# Altium PCB ui_layout-v1.1.PcbDoc
Units mil, origin at the board's own origin, x right, y up, seen from the top; angles counter-clockwise.
Board outline 3110 x 2130 mil, 4 copper layers (Signal Layer 1, Power Plane, GND Plane, Signal Layer 2), stack 63.189 mil thick; 80 components, 72 nets, 283 pads, 452 vias.
Unrouted connection lines stored in the file: 97.
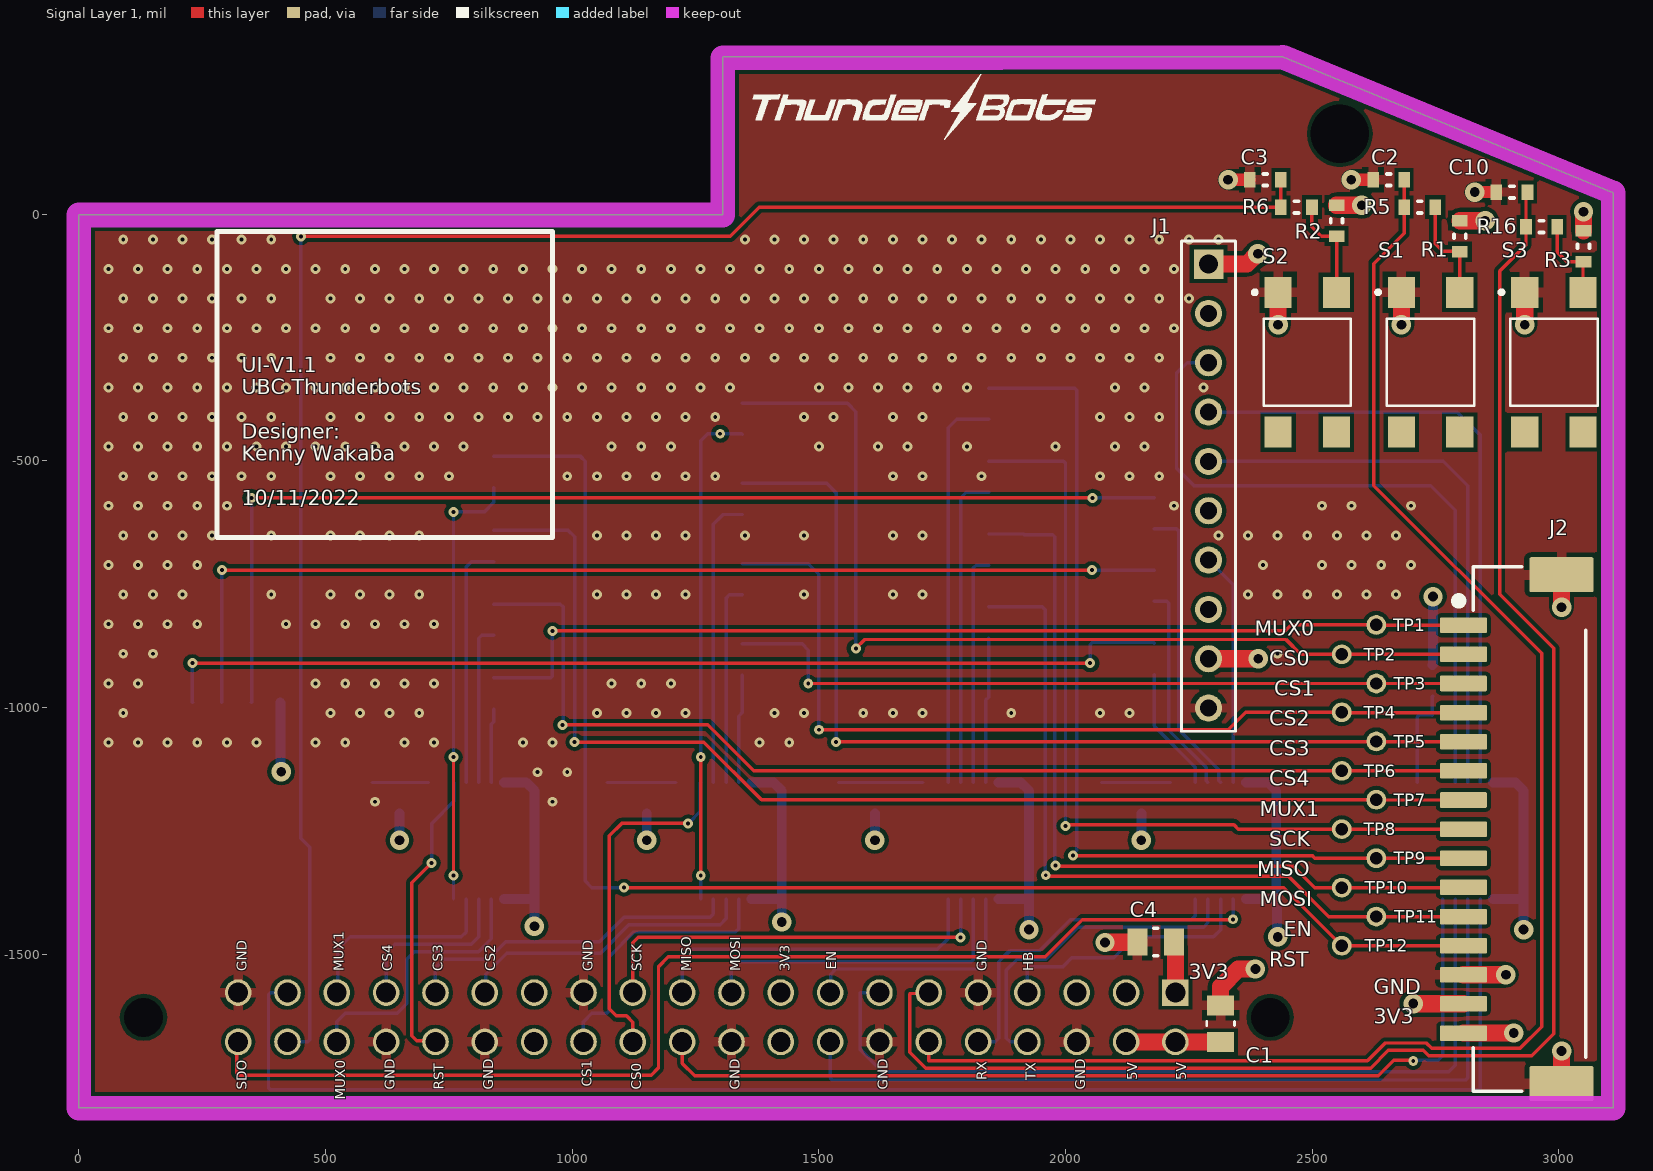
[diagram p0: Signal Layer 1 view]
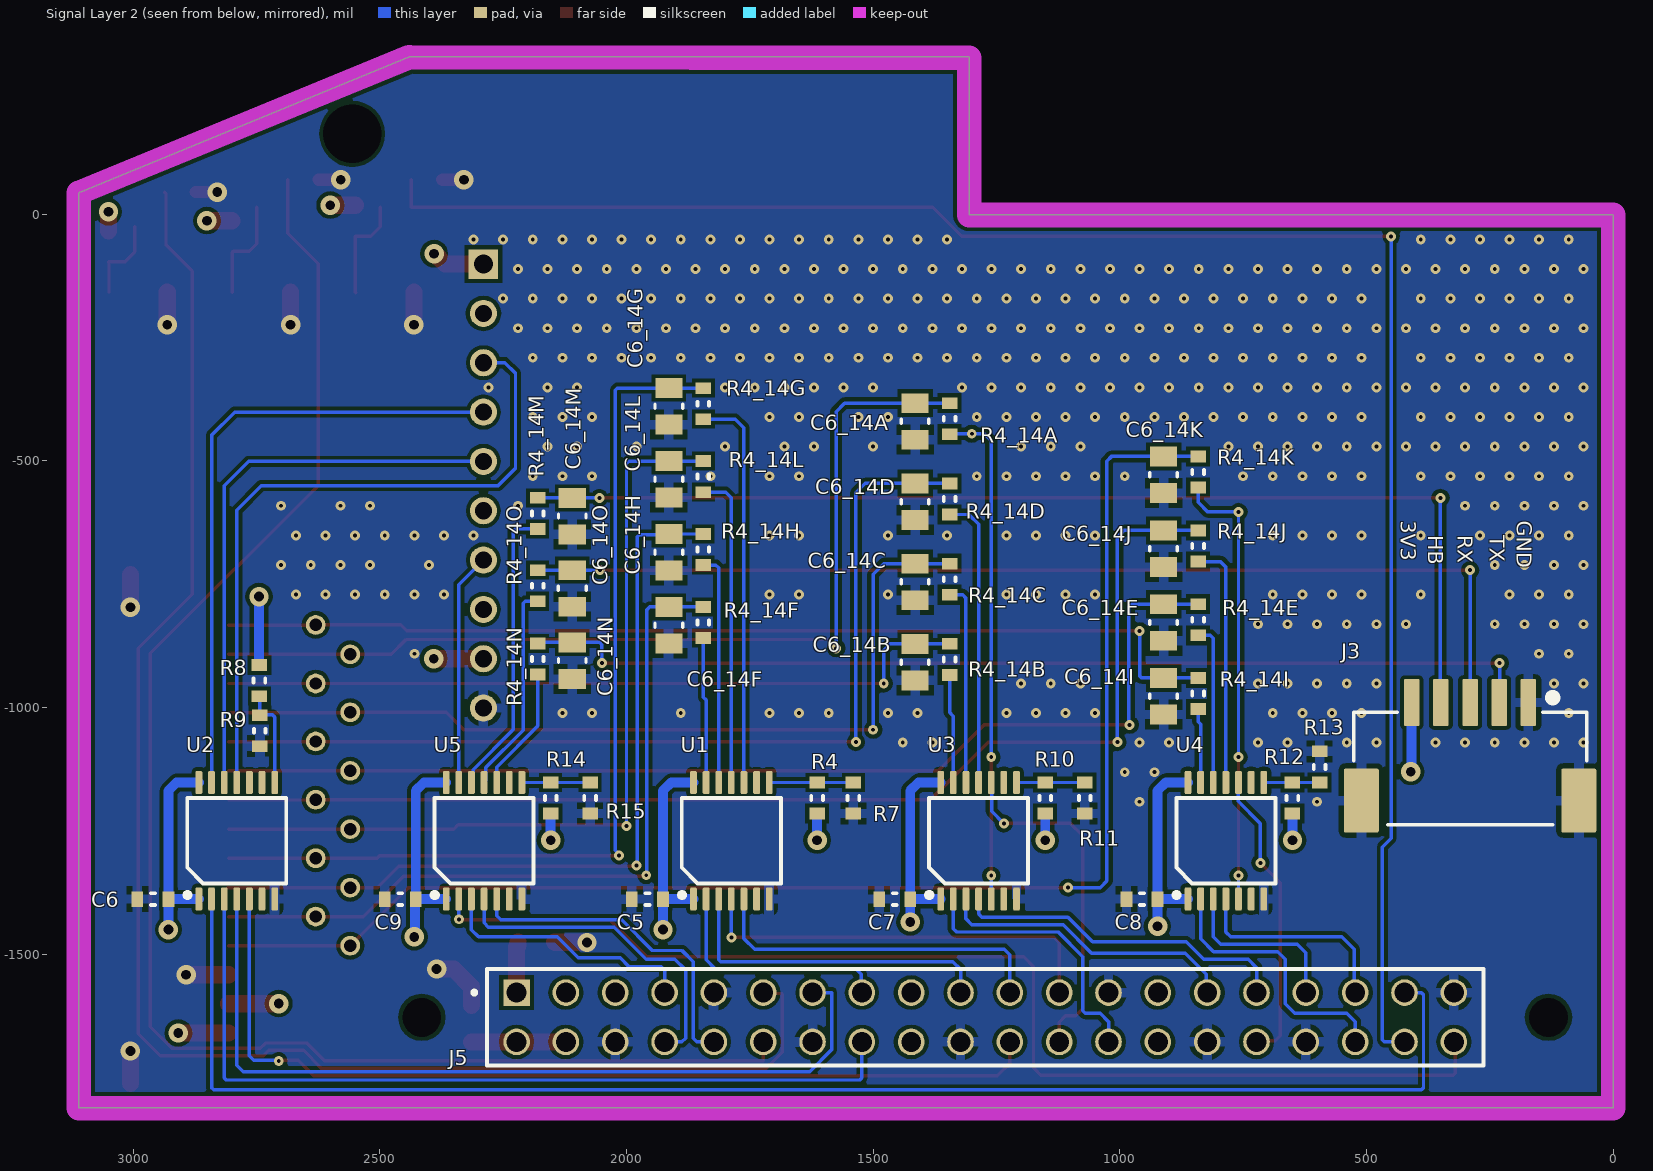
[diagram p1: Signal Layer 2 view, seen from below]
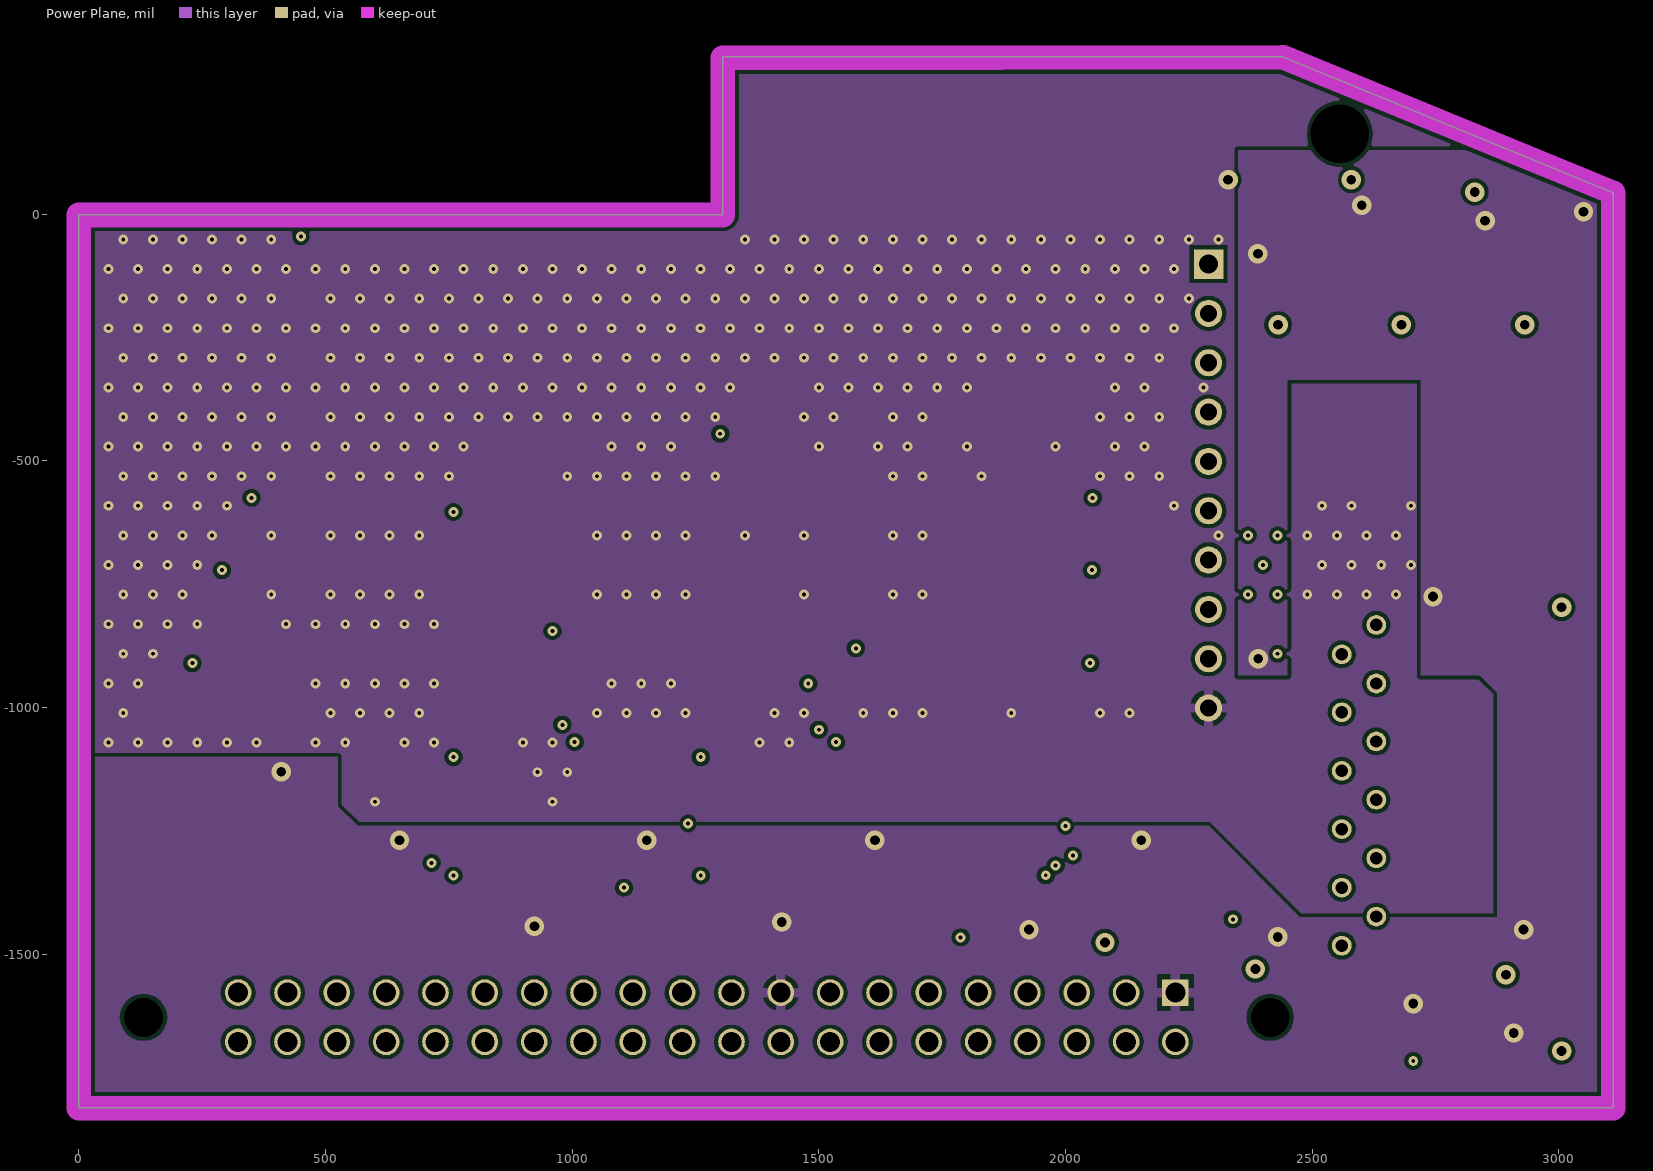
[diagram p2: Power Plane]
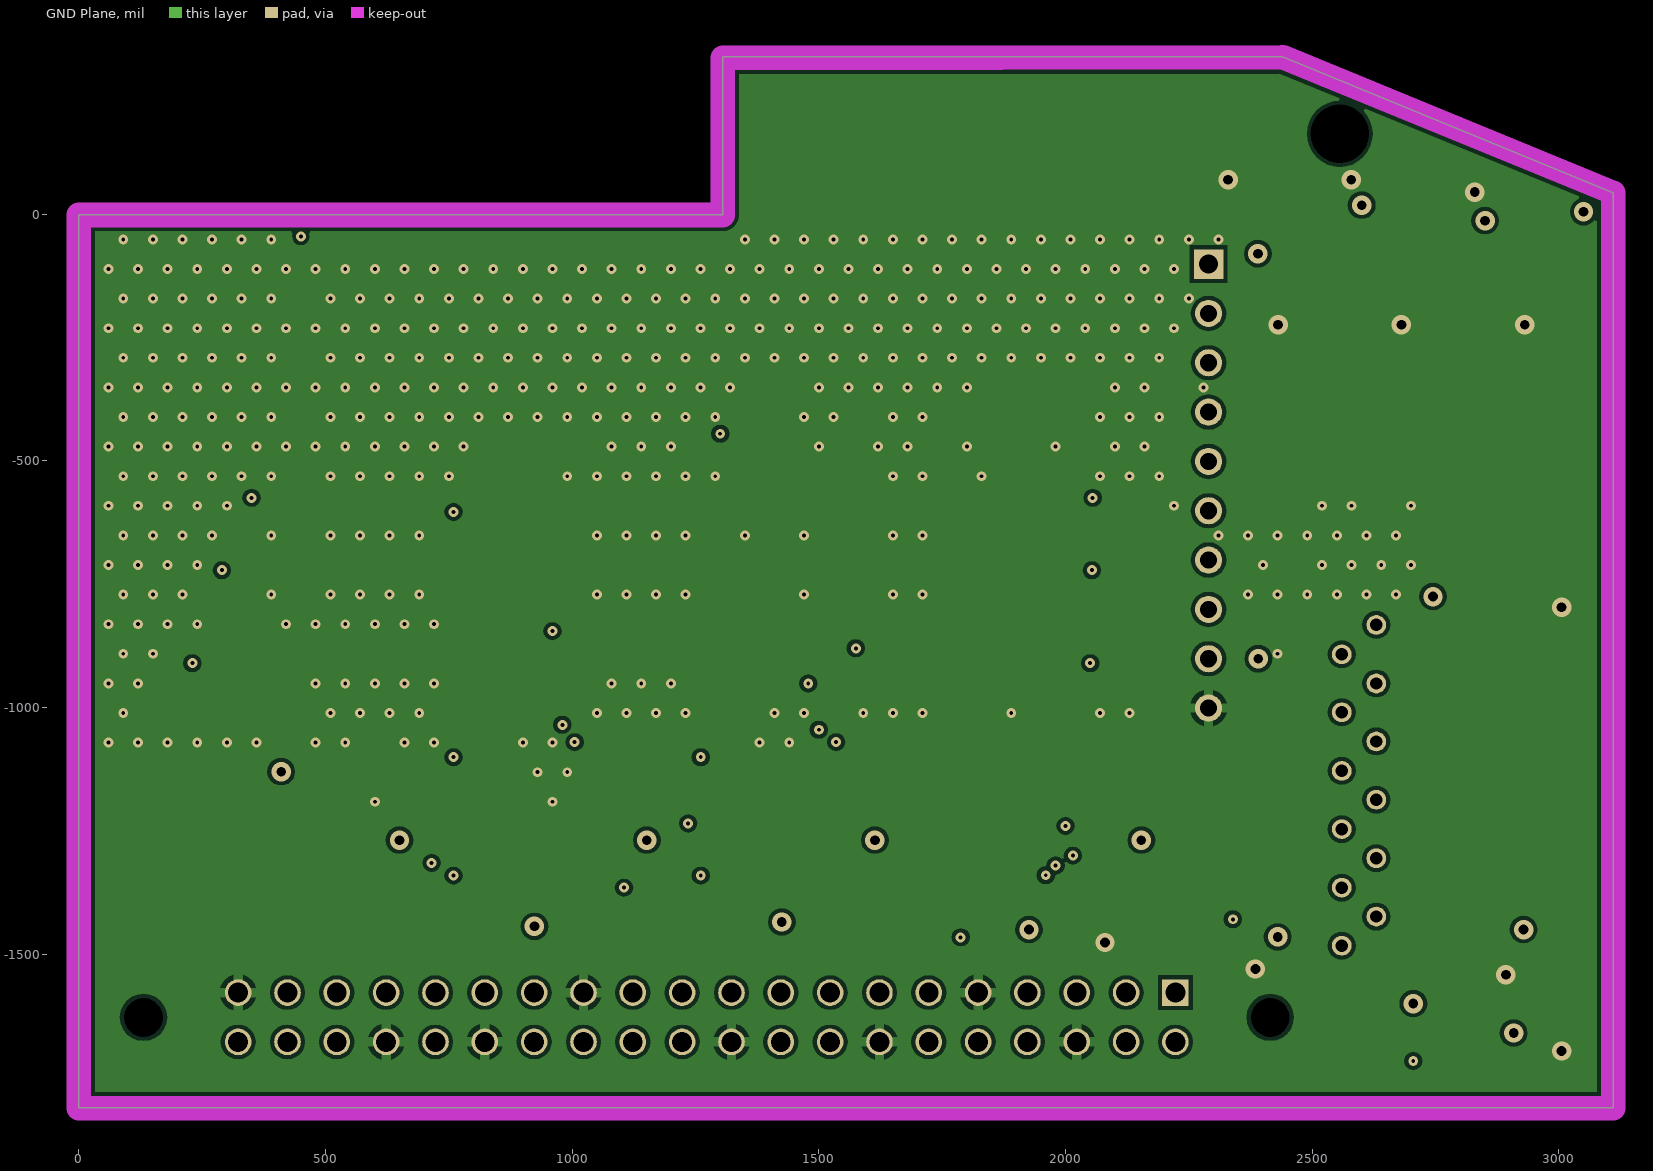
[diagram p3: GND Plane]

## Layer stack, top to bottom
Top Mask: solder mask 0.591, Solder Resist, Dk 3.8
Signal Layer 1: signal copper 1.378
Dielectric 1: prepreg 3.937, 2313, Dk 4.05
Power Plane: signal copper 1.378
Core: core 49.803, FR-4, Dk 4.5
GND Plane: signal copper 1.378
Dielectric 2: prepreg 3.937, 2313, Dk 4.05
Signal Layer 2: signal copper 1.378
Bottom Mask: solder mask 0.591, Solder Resist, Dk 3.8

## Board outline
1305,319 1305,-1 0,-1 0,-1811 3110,-1811 3110,44 2440,319

## Design rules (kind name [scope] priority, off if disabled: settings)
BoardOutlineClearance [All] p1: gap=7.87 ignorepadtopadclearanceinfootprint=FALSE except(15.75: Arc-SplitBarrior Arc-SplitContinuation Track-SplitBarrior Track-SplitContinuation SMDPad-SplitBarrior SMDPad-SplitContinuation THPad-SplitBarrior THPad-SplitContinuation Via-SplitBarrior Via-SplitContinuation Fill-SplitBarrior Fill-SplitContinuation Poly-SplitBarrior Poly-SplitContinuation Region-SplitBarrior Region-SplitContinuation Text-SplitBarrior Text-SplitContinuation)
Clearance "JETSON_5V Polygon Clearance" [(InNet('JETSON_5V')) AND InPolygon] p1: gap=15 ignorepadtopadclearanceinfootprint=FALSE
Clearance "POWER_5V Polygon Clearance" [(InNet('POWER_5V')) AND InPolygon] p2: gap=20 ignorepadtopadclearanceinfootprint=TRUE
Clearance [All] p3: gap=8 ignorepadtopadclearanceinfootprint=FALSE
HoleSize [All] p1: absolutevalues=TRUE maxlimit=248.03 minlimit=7.87 maxpercent=80.000 minpercent=20.000
MinimumAnnularRing [All] p1: minimumring=3
MinimumSolderMaskSliver [All] p1: minsoldermaskwidth=3.94
PolygonConnect PolygonConnect_1 [All] p1: thpad.connectstyle=Relief thpad.reliefconductorwidth=20 thpad.reliefentries=4 thpad.polygonreliefangle="90 Angle" thpad.airgapwidth=10 smdpad.connectstyle=Relief smdpad.reliefconductorwidth=20 smdpad.reliefentries=4 smdpad.polygonreliefangle="90 Angle" smdpad.airgapwidth=10 via.connectstyle=Direct via.reliefconductorwidth=20 via.reliefentries=4 via.polygonreliefangle="90 Angle" via.airgapwidth=10
RoutingCorners [All] p1: cornerstyle=Round minsetback=100 maxsetback=100
RoutingVias [All] p1: holewidth=19.68 width=39.37 viastyle="Through Hole" minholewidth=7.87 minwidth=17.72 maxholewidth=39.37 maxwidth=78.74
SilkToSilkClearance [All] p1: silktosilkclearance=3.94
SilkToSolderMaskClearance [IsPad] p1: minsilkscreentomaskgap=3.94 clearancetoexposedcopper=TRUE
SolderMaskExpansion SolderMaskExpansion_Via [IsVia] p1: expansion=4 istentingtop=TRUE
SolderMaskExpansion [All] p2: expansion=4 istentingtop=FALSE
Width [All] p1: maxlimit=100 minlimit=4 preferedwidth=7
25 further rules are at their usual default settings.

## Classes and differential pairs
component class U_buffers: C5 C6 C7 C8 C9 R4 R7 R8 R9 R10 R11 R12 R13 R14 R15 U1 U2 U3 U4 U5
component class LF_PWR_HRBT: C6_14M R4_14M
component class LF_MD_MUX_0: C6_14I R4_14I
component class LF_MD_RESET: C6_14K R4_14K
component class LF_MD_CS0: C6_14A R4_14A
component class LF_PWR_RX: C6_14N R4_14N
component class LF_MD_MUX_1: C6_14J R4_14J
component class LF_MD_CS1: C6_14B R4_14B
component class LF_MD_CS2: C6_14C R4_14C
component class U_jetson-nano: C1 C4 J4 J5
component class U_power: J3
component class U_motor-driver: J2 TP1 TP2 TP3 TP4 TP5 TP6 TP7 TP8 TP9 TP10 TP11 TP12
component class U_interface-switches: C2 C3 C10 R1 R2 R3 R5 R6 R16 S1 S2 S3
component class U_display: J1
component class LF_MD_SCK: C6_14L R4_14L
component class LF_PWR_TX: C6_14O R4_14O
component class LF_MD_MOSI: C6_14H R4_14H
component class LF_MD_MISO: C6_14G R4_14G
component class LF_MD_EN: C6_14F R4_14F
component class LF_MD_CS4: C6_14E R4_14E
component class LF_MD_CS3: C6_14D R4_14D
channel class low-pass-filter: CTRL_EN_FILTER HEARTBEAT_FILTER LF_MD_CS0 LF_MD_CS1 LF_MD_CS2 LF_MD_CS3 LF_MD_CS4 LF_MD_EN LF_MD_MISO LF_MD_MOSI LF_MD_MUX_0 LF_MD_MUX_1 LF_MD_RESET LF_MD_SCK LF_PWR_HRBT LF_PWR_RX LF_PWR_TX RESET_FILTER SPI1_CS0_FILTER SPI1_CS1_FILTER SPI1_CS2_FILTER SPI1_CS3_FILTER SPI1_CS4_FILTER SPI1_CS5_FILTER SPI1_MISO_FILTER SPI1_MOSI_FILTER SPI1_SCK_FILTER UART2_RX_FILTER UART2_TX_FILTER

## Components (designator, comment, footprint, x,y, rotation, side; value= is the part's Value field where it differs from the comment)
C1 "0.10uF 25V" 0805 2314.34,-1640.76 r270 top value=0.1uF
C2 "0.10uF" 0603 2655.04,70 r0 top
C3 "0.10uF" 0603 2405.04,70 r0 top
C4 "0.10uF 25V" 0805 2183,-1475 r0 top value=0.1uF
C5 "0.10uF" 0603 1957.5,-1388.11 r0 bottom
C6 "0.10uF" 0603 2960,-1388.11 r0 bottom
C6_14A "330pF" 0805 1415,-420 r90 bottom (schematic designator C6_14)
C6_14B "330pF" 0805 1415,-908 r90 bottom (schematic designator C6_14)
C6_14C "330pF" 0805 1415,-745.33 r90 bottom (schematic designator C6_14)
C6_14D "330pF" 0805 1415,-582.67 r90 bottom (schematic designator C6_14)
C6_14E "330pF" 0805 911.28,-827.5 r90 bottom (schematic designator C6_14)
C6_14F "330pF" 0805 1914.18,-833 r90 bottom (schematic designator C6_14)
C6_14G "330pF" 0805 1914.18,-389.44 r90 bottom (schematic designator C6_14)
C6_14H "330pF" 0805 1914.18,-685.15 r90 bottom (schematic designator C6_14)
C6_14I "330pF" 0805 911.28,-977 r90 bottom (schematic designator C6_14)
C6_14J "330pF" 0805 911.28,-678 r90 bottom (schematic designator C6_14)
C6_14K "330pF" 0805 911.28,-528 r90 bottom (schematic designator C6_14)
C6_14L "330pF" 0805 1914.18,-537.29 r90 bottom (schematic designator C6_14)
C6_14M "330pF" 0805 2110,-612 r90 bottom (schematic designator C6_14)
C6_14N "330pF" 0805 2110,-905 r90 bottom (schematic designator C6_14)
C6_14O "330pF" 0805 2110,-758.5 r90 bottom (schematic designator C6_14)
C7 "0.10uF" 0603 1456.25,-1388.11 r0 bottom
C8 "0.10uF" 0603 955,-1388.11 r0 bottom
C9 "0.10uF" 0603 2458.75,-1388.11 r0 bottom
C10 "0.10uF" 0603 2905,45 r0 top
J1 "CN LCD TFT 128X160 1.8in" "CN LCD TFT 128X160 1.8in" 2290,-101 r0 top locked
J2 "BM15B-ZESS-TBT(LF)(SN)" "JST ZE SMT 15POS" 2915,-1276 r90 top locked
J3 "BM05B-ZESS-TBT(LF)(SN)" "JST ZE SMT 5POS" 290,-1098 r180 bottom locked
J5 "CN HDR 40POS" "CN HDR 40POS 0.1 TH" 1272.83,-1627.77 r0 bottom locked
R1 "10k" 0603 2799.53,-44.53 r270 top
R2 "10k" 0603 2549.53,-13.03 r270 top
R3 "10k" 0603 3050,-65 r270 top
R4 "JUMPER" 0603 1613.66,-1183.39 r90 bottom value=0
R4_14A "JUMPER" 0603 1345,-414.5 r270 bottom (schematic designator R4_14)
R4_14B "JUMPER" 0603 1345,-902.5 r270 bottom (schematic designator R4_14)
R4_14C "JUMPER" 0603 1345,-739.83 r270 bottom (schematic designator R4_14)
R4_14D "JUMPER" 0603 1345,-577.16 r270 bottom (schematic designator R4_14)
R4_14E "JUMPER" 0603 841.28,-822 r270 bottom (schematic designator R4_14)
R4_14F "JUMPER" 0603 1844.18,-827.5 r270 bottom (schematic designator R4_14)
R4_14G "JUMPER" 0603 1844.18,-383.93 r270 bottom (schematic designator R4_14)
R4_14H "JUMPER" 0603 1844.44,-679.64 r270 bottom (schematic designator R4_14)
R4_14I "JUMPER" 0603 841.28,-971.5 r270 bottom (schematic designator R4_14)
R4_14J "JUMPER" 0603 841.28,-672.5 r270 bottom (schematic designator R4_14)
R4_14K "JUMPER" 0603 841.28,-522.5 r270 bottom (schematic designator R4_14)
R4_14L "JUMPER" 0603 1844.18,-531.79 r270 bottom (schematic designator R4_14)
R4_14M "JUMPER" 0603 2180,-606.5 r270 bottom (schematic designator R4_14)
R4_14N "JUMPER" 0603 2180,-901.5 r270 bottom (schematic designator R4_14)
R4_14O "JUMPER" 0603 2180,-753 r270 bottom (schematic designator R4_14)
R5 "10k" 0603 2718.03,14.53 r0 top
R6 "10k" 0603 2468.03,14.53 r0 top
R7 "JUMPER" 0603 1540,-1183.39 r270 bottom value=0
R8 "JUMPER" 0603 2744.03,-945.32 r270 bottom value=0
R9 "JUMPER" 0603 2743.29,-1046.81 r270 bottom value=0
R10 "JUMPER" 0603 1151.25,-1183.39 r90 bottom value=0
R11 "JUMPER" 0603 1071.25,-1183.39 r270 bottom value=0
R12 "JUMPER" 0603 650,-1183.39 r90 bottom value=0
R13 "JUMPER" 0603 595,-1120.39 r90 bottom value=0
R14 "JUMPER" 0603 2153.75,-1183.39 r90 bottom value=0
R15 "JUMPER" 0603 2073.75,-1183.39 r270 bottom value=0
R16 "10k" 0603 2965,-25 r0 top
S1 "SW PUSH NO SMD" TL3305 2740,-300 r0 top
S2 "SW PUSH NO SMD" TL3305 2490,-300 r0 top
S3 "SW PUSH NO SMD" TL3305 2990,-300 r0 top
TP1 "Test Point (Via)" TP 2630,-832.45 r0 top
TP2 "Test Point (Via)" TP 2560,-892.14 r90 top
TP3 "Test Point (Via)" TP 2630,-951.2 r90 top
TP4 "Test Point (Via)" TP 2560,-1009.61 r90 top
TP5 "Test Point (Via)" TP 2630,-1068.67 r90 top
TP6 "Test Point (Via)" TP 2560,-1128.36 r90 top
TP7 "Test Point (Via)" TP 2630,-1186.78 r90 top
TP8 "Test Point (Via)" TP 2560,-1246.47 r90 top
TP9 "Test Point (Via)" TP 2630,-1305.53 r90 top
TP10 "Test Point (Via)" TP 2560,-1365 r90 top
TP11 "Test Point (Via)" TP 2630,-1423.64 r90 top
TP12 "Test Point (Via)" TP 2560,-1482.69 r90 top
U1 "TXU0304PWR" 14-TSSOP 1787.5,-1270 r90 bottom
U2 "TXU0304PWR" 14-TSSOP 2790,-1270 r90 bottom
U3 "TXU0304PWR" 14-TSSOP 1286.25,-1270 r90 bottom
U4 "TXU0304PWR" 14-TSSOP 785,-1270 r90 bottom
U5 "TXU0304PWR" 14-TSSOP 2288.75,-1270 r90 bottom

## Footprints (in the part's own frame and the unit in brackets; to place one, negate y for a bottom-side part, rotate by r counter-clockwise, add the part's x,y. Pads: shape width x height; smd on the part's side, far side on the other; paste and mask are expansions set on the pad)
14-TSSOP [mm]
  rrect50% 1.2x0.35 smd mask+0.07: 1(-3,1.95) 2(-3,1.3) 3(-3,0.65) 4(-3,0) 5(-3,-0.65) 6(-3,-1.3) 7(-3,-1.95) 8(3,-1.95) 9(3,-1.3) 10(3,-0.65) 11(3,0) 12(3,0.65) 13(3,1.3) 14(3,1.95)
  silkscreen extent -2.8,-2.55 2.2,2.55, body extent -3.2,-2.5 3.2,2.5, height 1.13
0603 [mm] "Chip Resistor, 2-Leads, Body 1.60x0.80mm, IPC High Density"
  rect 0.6x0.8 smd mask+0.1: 1(-0.8,0) 2(0.8,0)
  silkscreen extent -0.1,-0.3 0.1,0.3, body extent -0.8,-0.4 0.8,0.4, height 0.6
0805 [mil] "40 Position Header Connector 0.100\" (2.54mm) Through Hole"
  rect 40x55 smd: 1(-37,0) 2(37,0)
  silkscreen extent -4,-28 4,28, body extent -47,-28 47,28, height 24
"CN HDR 40POS 0.1 TH" [mm] "40 Position Header Connector 0.100\" (2.54mm) Through Hole"
  rect 1.37x1.37 hole 1.02: 01(24.13,-1.27)
  round 1.37 hole 1.02: 02(24.13,1.27) 03(21.59,-1.27) 04(21.59,1.27) 05(19.05,-1.27) 06(19.05,1.27) 07(16.51,-1.27) 08(16.51,1.27) 09(13.97,-1.27) 10(13.97,1.27) 11(11.43,-1.27) 12(11.43,1.27) 13(8.89,-1.27) 14(8.89,1.27) 15(6.35,-1.27) 16(6.35,1.27) 17(3.81,-1.27) 18(3.81,1.27) 19(1.27,-1.27) 20(1.27,1.27) 21(-1.27,-1.27) 22(-1.27,1.27) 23(-3.81,-1.27) 24(-3.81,1.27) 25(-6.35,-1.27) 26(-6.35,1.27) 27(-8.89,-1.27) 28(-8.89,1.27) 29(-11.43,-1.27) 30(-11.43,1.27) 31(-13.97,-1.27) 32(-13.97,1.27) 33(-16.51,-1.27) 34(-16.51,1.27) 35(-19.05,-1.27) 36(-19.05,1.27) 37(-21.59,-1.27) 38(-21.59,1.27) 39(-24.13,-1.27) 40(-24.13,1.27)
  silkscreen extent -25.66,-2.47 26.4,2.47
"CN LCD TFT 128X160 1.8in" [mil]
  rect 60x60 hole 38 mask+0: 1(0,0)
  round 55 hole 35 mask+0: 2(0,-100) 3(0,-200) 4(0,-300) 5(0,-400) 6(0,-500) 7(0,-600) 8(0,-700) 9(0,-800) 10(0,-900)
  silkscreen extent -55,-947 55,47, body extent -50,-955 50,45, height 90
"JST ZE SMT 5POS" [mm] "5 POS HDR JST ZE"
  rrect10% 1.8x3.3 smd: 0(-5.6,-2.3) 0(5.6,-2.3)
  rrect10% 0.8x2.4 smd: 1(3,2.75) 2(1.5,2.75) 3(0,2.75) 4(-1.5,2.75) 5(-3,2.75)
  silkscreen extent -6,-3.55 6,3, body extent -6,-2.9 6,4.1, height 7.51
"JST ZE SMT 15POS" [mm] "15 POS HDR JST ZE"
  rrect10% 1.8x3.3 smd: 0(-12.35,-2.3) 0(13.85,-2.3)
  rrect10% 0.8x2.4 smd: 1(11.25,2.75) 2(9.75,2.75) 3(8.25,2.75) 4(6.75,2.75) 5(5.25,2.75) 6(3.75,2.75) 7(2.25,2.75) 8(0.75,2.75) 9(-0.75,2.75) 10(-2.25,2.75) 11(-3.75,2.75) 12(-5.25,2.75) 13(-6.75,2.75) 14(-8.25,2.75) 15(-9.75,2.75)
  silkscreen extent -12.75,-3.55 14.26,3, body extent -12.75,-3.55 14.25,3.45, height 7.6
TL3305 [mm] "TL3305 SPST-NO"
  rect 1.4x1.6 smd: 1(-1.5,3.6) 2(-1.5,-3.6) 3(1.5,3.6) 4(1.5,-3.6)
  silkscreen extent -2.8,-2.25 2.25,3.7
TP [mil] "Test point (40mil Standard)"
  round 40 hole 25: 1(0,0)

## Part data
C1 C4: library part "CAP 0.10uF 25V", "CAP CER 0.10UF 25V X7R 0805", Operating Temperature="-55°C ~ 125°C", Rating=25V, Temperature Coefficient=X7R, Tolerance=10%, Part Number="CAP 0.10uF 25V"
C2 C3 C5 C6 C7 C8 C9 C10: library part "CAP 0.10uF 16V", "CAP CER 0.10UF 16V X5R 0603", Operating Temperature="-55°C ~ 85°C", Package=0603/0805, Rating=16V, Temperature Coefficient=X5R, Tolerance=10%, Part Number="CAP 0.10uF 16V"
C6_14A C6_14B C6_14C C6_14D C6_14E C6_14F C6_14G C6_14H C6_14I C6_14J C6_14K C6_14L C6_14M C6_14N C6_14O: library part "CAP 330pF 16V", "CAP CER 330PF 16V X5R 0603/0805", Operating Temperature="-55°C ~ 85°C", Package=0603/0805, Rating=16V, Temperature Coefficient=X5R, Tolerance=10%, Part Number="CAP 330pF 16V"
J1: "Graphic LCD Display Module Transmissive Red, Green, Blue (RGB) TFT - Color SPI 1.8\" (45.72mm) 128 x 160", Manufacturer Part Number 1=358, Supplier Part Number 1=1528-1536-ND, Part Number="CN LCD TFT 128X160 1.8in", Pin Count=10, Supplier 1=Digi-Key, Supplier URL 1=https://www.digikey.ca/en/products/detail/adafruit-industries-llc/358/5801368
J2: library part "CN 15POS JST ZE SMT", "CONN HEADER VERT SMD 15POS ZE", Supplier Part Number 1=455-4211-1-ND, Manufacturer Part Number 1=BM15B-ZESS-TBT(LF)(SN), Part Number="CN 15POS JST ZE SMT", Pin Count=15, Supplier 1=Digi-Key, Supplier URL 1=https://www.digikey.ca/en/products/detail/jst-sales-america-inc/BM15B-ZESS-TBT-LF-SN/1886999?s=N4IgTCBcDaIEIFkCMBWOBaAWgUQMq-QBU5CAKAGQDEBKU3AOWpAF0BfIA
J3: library part "CN 5POS JST ZE SMT", "CONN HEADER VERT SMD 5POS ZE", Supplier Part Number 1=455-2383-1-ND, Manufacturer Part Number 1=BM05B-ZESS-TBT(LF)(SN), Part Number="CN 5POS JST ZE SMT", Pin Count=5, Supplier 1=Digi-Key, Supplier URL 1=https://www.digikey.ca/en/products/detail/jst-sales-america-inc/BM05B-ZESS-TBT-LF-SN/1886989?s=N4IgTCBcDaIEIFkAMBWOBaAWgUQMq-QBU5CAKAGQDEBKU3AOWpAF0BfIA
J5: "40 Position Header Connector", Supplier Part Number 1=S6104-ND, Part Number="CN HDR 40POS", Pin Count=40, Supplier 1=Digi-Key, Supplier URL 1=https://www.digikey.ca/en/products/detail/sullins-connector-solutions/PPTC202LFBN-RC/807240?s=N4IgTCBcDaIMoDYCMAGALAWgHIBEQF0BfIA
R1 R2 R3 R5 R6 R16: library part "RES 10k 1/8W - 5%", "RES SMD 10K OHM 5% 1/8W 0805", Package=0805, Power (Watts)=0.125W, Tolerance=5%, Part Number="RES 10k 1/8W - 5%"
R4 R7 R8 R9 R10 R11 R12 R13 R14 R15: library part "RES 0 JUMPER", "RES SMD 0 OHM JUMPER GENERIC 0603", Manufacturer Part Number 1=RK73Z1JTTD, Package=0805, Supplier Part Number 1=2019-RK73Z1JTTDCT-ND, Tolerance=N/A, Part Number="RES 0 JUMPER", Supplier 1=Digi-Key, Supplier URL 1=https://www.digikey.ca/en/products/detail/koa-speer-electronics-inc/RK73Z1JTTD/9845478
R4_14A R4_14B R4_14C R4_14D R4_14E R4_14F R4_14G R4_14H R4_14I R4_14J R4_14K R4_14L R4_14M R4_14N R4_14O: library part "RES 0 JUMPER", "RES SMD 0 OHM JUMPER GENERIC 0805"
S1 S2 S3: "Switch Tactile N.O. SPST Round Button Gull Wing 0.05A 12VDC 2.55N SMD T/R", Manufacturer Part Number 1="TL3305BF260QG / TL3305BF260QG", Supplier Part Number 1=EG5354CT-ND, Part Number="SW PUSH NO SMD", Supplier 1=Digi-Key, Supplier URL 1=https://www.digikey.ca/en/products/detail/e-switch/TL3305BF260QG/5816185?s=N4IgTCBcDaIKIHECsBmJAWAwgFQLQDkAREAXQF8g
U1 U2 U3 U4 U5: library part TXU0304, "4-Bit Fixed Direction Voltage-Level Translator with Schmitt-Trigger Inputs  and 3-State Outputs", Mfr_Name="Texas Instruments", Supplier Part Number 1=296-TXU0304PWRTR-ND, Copyright="Copyright (C) 2022 Ultra Librarian. All rights reserved.", Digi-Key_Part_Number_1=296-TXU0304PWRTR-ND, Digi-Key_Part_Number_2=296-TXU0304PWRCT-ND, Digi-Key_Part_Number_3=296-TXU0304PWRDKR-ND, Manufacturer_Part_Number=TXU0304PWR, Part Number=TXU0304, RefDes=RefDes, Supplier 1=Digi-Key, Supplier URL 1=https://www.digikey.ca/en/products/detail/texas-instruments/TXU0304PWR/14641423, Type=DEV
TP1 TP2 TP3 TP4 TP5 TP6 TP7 TP8 TP9 TP10 TP11 TP12: Part Number="Test Point (Via)"

## Free pads (board coordinates)
  round 60 hole 78.74: 1(131,-1628) 1(2415,-1628)
  round 60 hole 118.11: 1(2556,163)

## Via types
v1: diameter 20, hole 7.87, Signal Layer 1 to Signal Layer 2, tented both sides, 423 vias
v2: diameter 39.37, hole 19.68, Signal Layer 1 to Signal Layer 2, tented both sides, 29 vias

## Nets (pads, with @x,y where several pads share a name; then routed paths per layer and width w, separated by ;. In a path a pad name is that pad's centre, name@x,y a point inside that pad or via, vN(x,y) a via of type N, cw(c..) or ccw(c..) an arc to the next point about the centre after c; other vN are vias at no path point)
BF_CARD_CS_DS: J1.6
BF_CS_CTRL_0: R4_14A.2 U3.5 | length 1019.5
  Signal Layer 1 w7: v1(1260.66,-1340.56) v1(1260.66,-1100.59)
  Signal Layer 2 w7: U3.5 v1(1260.66,-1340.56) ; v1(1260.66,-1100.59) 1260.66,-459.34 1275,-445 v1(1300,-445) 1344.01,-445 R4_14A.2
BF_CS_CTRL_1: R4_14B.2 U3.13 | length 221
  Signal Layer 2 w7: U3.13 1337.43,-1017.57 1345,-1010 R4_14B.2
BF_CS_CTRL_2: R4_14C.2 U3.12 | length 409.7
  Signal Layer 2 w7: U3.12 1311.84,-778.16 1318.67,-771.33 R4_14C.2
BF_CS_CTRL_3: R4_14D.2 U3.11 | length 590.2
  Signal Layer 2 w7: U3.11 1286.25,-628.75 1306.34,-608.66 R4_14D.2
BF_CS_CTRL_4: R4_14E.2 U4.12 | length 325.6
  Signal Layer 2 w7: U4.12 810.59,-859.41 816.51,-853.49 R4_14E.2
BF_D/C_DS: J1.7 U5.13 | length 471.6
  Signal Layer 2 w7: J1.7 2339.93,-750.93 U5.13
BF_DRV_EN: R4_14F.2 U1.13 | length 295.2
  Signal Layer 2 w7: U1.13 1838.68,-984.67 1844.18,-979.18 R4_14F.2
BF_HRBT: R4_14M.2 U5.12 | length 596.4
  Signal Layer 2 w7: R4_14M.2 2225.9,-637.99 2230,-642.09 2230,-1045 2310.95,-1125.95 2310.95,-1148.5 U5.12
BF_MISO: R4_14G.2 U1.10 | length 808.4
  Signal Layer 2 w7: U1.10 1761.91,-433.09 1779.57,-415.43 R4_14G.2
BF_MISO_DS: J1.2 U2.10
BF_MOSI: R4_14H.2 U1.12 | length 468.7
  Signal Layer 2 w7: U1.12 1813.09,-716.91 1818.86,-711.14 R4_14H.2
BF_MOSI_DS: J1.4 U2.13 | length 1274.4
  Signal Layer 2 w7: J1.4 2793.9,-401 2841.18,-448.28 U2.13
BF_MUX_SEL_0: R4_14I.2 U4.13 | length 151
  Signal Layer 2 w7: U4.13 836.18,-1033.82 841.28,-1028.72 R4_14I.2
BF_MUX_SEL_1: R4_14J.2 U4.11 | length 497.7
  Signal Layer 2 w7: U4.11 785,-715 796.01,-703.99 R4_14J.2
BF_RESET: R4_14K.2 U4.5 | length 904.4
  Signal Layer 1 w7: v1(759.41,-1340.56) v1(759.41,-1100.59)
  Signal Layer 2 w7: U4.5 v1(759.41,-1340.56) ; v1(759.41,-1100.59) v1(759.41,-603.5) 821.5,-603.5 841.28,-583.72 R4_14K.2
BF_RESET_DS: J1.8
BF_RX: R4_14N.2 U5.10 | length 253.3
  Signal Layer 2 w7: R4_14N.2 2180,-1037.43 2263.16,-1120.59 U5.10
BF_SCK: R4_14L.2 U1.11 | length 638.7
  Signal Layer 2 w7: U1.11 1787.5,-574.61 1798.82,-563.28 R4_14L.2
BF_SCK_DS: J1.3 U2.11 | length 1419.6
  GND Plane w7: J1.3 J1.3@2291,-302
  Signal Layer 2 w7: J1.3 2246.63,-301 2225,-322.63 2225,-514.6 2260.4,-550 2740,-550 2790,-600 U2.11
BF_TFT_CS_DS: J1.5 U2.12 | length 1147.4
  Signal Layer 2 w7: J1.5 2766,-501 2815.59,-550.59 U2.12
BF_TX: R4_14O.2 U5.11 | length 427.3
  Signal Layer 2 w7: R4_14O.2 2205.39,-784.49 2209.49,-788.59 2209.49,-1045.71 2285.36,-1121.57 2285.36,-1148.5 U5.11
CS_CTRL_0: C6_14A.2 J2.2 R4_14A.1 TP2.1 | length 1968.7
  Signal Layer 1 w7: v1(1575,-880) 1593,-862 2447,-862 2477.14,-892.14 TP2.1 J2.2
  Signal Layer 2 w7: R4_14A.1 C6_14A.2 1558,-383 1575,-400 v1(1575,-880)
CS_CTRL_1: C6_14B.2 J2.3 R4_14B.1 TP3.1 | length 1534.6
  Signal Layer 1 w7: v1(1478.45,-951.2) TP3.1 J2.3
  Signal Layer 2 w7: R4_14B.1 C6_14B.2 1466,-871 1478.45,-883.45 v1(1478.45,-951.2)
CS_CTRL_2: C6_14C.2 J2.4 R4_14C.1 TP4.1 | length 1800.4
  Signal Layer 1 w7: v1(1499.95,-1045) 2330,-1045 2365.39,-1009.61 TP4.1 ; TP4.1@2560,-1010.25 J2.4
  Signal Layer 2 w7: R4_14C.1 C6_14C.2 1478.33,-708.33 1499.95,-729.95 v1(1499.95,-1045)
CS_CTRL_3: C6_14D.2 J2.5 R4_14D.1 TP5.1 | length 1975.3
  Signal Layer 1 w7: v1(1535,-1070) 1535.67,-1069.33 2629.33,-1069.33 TP5.1 ; TP5.1@2630,-1069.31 J2.5
  Signal Layer 2 w7: R4_14D.1 C6_14D.2 1515.67,-545.67 1535,-565 v1(1535,-1070)
CS_CTRL_4: C6_14E.2 J2.6 R4_14E.1 TP6.1 | length 2247.5
  Signal Layer 1 w7: v1(980,-1035) 1275,-1035 1368.36,-1128.36 TP6.1 J2.6
  Signal Layer 2 w7: R4_14E.1 C6_14E.2 975.9,-790.5 981.5,-796.1 981.5,-1033.5 v1(980,-1035)
DRV_EN: C6_14F.2 J2.11 R4_14F.1 TP11.1 | length 1537
  Signal Layer 1 w7: v1(1960,-1340) 1961.5,-1341.5 2451.5,-1341.5 2533.64,-1423.64 TP11.1 J2.11
  Signal Layer 2 w7: R4_14F.1 C6_14F.2 1952.8,-796 1958.5,-801.7 1958.5,-1338.5 v1(1960,-1340)
HRBT: C6_14M.2 J3.4 R4_14M.1 | length 2245.1
  Signal Layer 1 w7: v1(350,-575) v1(2055,-575)
  Signal Layer 2 w7: J3.4 350,-988.79 v1(350,-575) ; v1(2055,-575) C6_14M.2 R4_14M.1
JETSON_3V3: C4.2 C5.1 C6.1 C7.1 C8.1 C9.1 J1.1 J1.9 J2.14 J2.15 J3.5 J5.01 J5.17 R1.1 R2.1 R3.1 R4.1 R8.1 R10.1 R12.1 R14.1 U1.1 U1.14 U2.1 U2.14 U3.1 U3.14 U4.1 U4.14 U5.1 U5.14 | length 3206.5
  Signal Layer 1 w35: C4.2 2220,-1482.5 2222.83,-1485.33 J5.01 ; J1.9 v2(2390.93,-901) ; J1.1 2367.82,-101 2388.82,-80 v2(2390,-80) ; R2.1 v2(2600.46,18.46) ; v2(2705,-1600) 2705.4,-1600.4 2806.33,-1600.4 J2.14 ; R1.1 v2(2850.46,-13.03) ; J2.15@2807.54,-1659.72 v2(2908.46,-1659.72) ; R3.1 v2(3050,5)
  Signal Layer 2 w20: J3.5 409.06,-990.68 409.06,-1129.06 v2(410,-1130) ; v2(650,-1268.78) R12.1 ; U4.1 C8.1 ; U4.14 906.89,-1151.89 923.5,-1168.5 C8.1 ; v2(923.5,-1443.5) C8.1 ; v2(1151.25,-1268.78) R10.1 ; U3.1 C7.1 ; U3.14 1408.14,-1151.89 1424.75,-1168.5 C7.1 ; v2(1425,-1434.71) 1424.88,-1434.59 1424.88,-1388.23 C7.1 ; v2(1613.66,-1268.78) R4.1 ; U1.1 C5.1 ; U1.14 1909.39,-1151.89 1926,-1168.5 C5.1 ; v2(1926,-1450) C5.1 ; v2(2153.75,-1268.78) R14.1 ; U5.1 C9.1 ; U5.14 2410.64,-1151.89 2427.25,-1168.5 C9.1 ; v2(2430,-1465) 2428.63,-1463.63 2428.63,-1389.48 C9.1 ; R8.1 2745,-912.85 v2(2745,-775) ; U2.1 C6.1 ; U2.14 2911.89,-1151.89 2928.5,-1168.5 C6.1 ; v2(2928.5,-1450) C6.1
JETSON_5V: C1.2 J5.02 J5.04 | length 191.5
  Signal Layer 1 w35: J5.04 J5.02 C1.2
JETSON_GND: C1.1 C2.1 C3.1 C4.1 C5.2 C6.2 C6_14A.1 C6_14B.1 C6_14C.1 C6_14D.1 C6_14E.1 C6_14F.1 C6_14G.1 C6_14H.1 C6_14I.1 C6_14J.1 C6_14K.1 C6_14L.1 C6_14M.1 C6_14N.1 C6_14O.1 C7.2 C8.2 C9.2 C10.1 J1.10 J2.0 J2.13 J3.0 J3.1 J5.06 J5.09 J5.14 J5.20 J5.25 J5.30 J5.34 J5.39 R7.2 R9.2 R11.2 R13.2 R15.2 S1.1 S2.1 S3.1 U1.7 U2.7 U3.7 U4.7 U5.7 | length 738.1
  Signal Layer 1 w25: v2(2329.53,70) C3.1 ; v2(2579.53,70) C2.1 ; v2(2829.49,45) C10.1
  Signal Layer 1 w35: v2(2080,-1476.19) 2080.59,-1475.59 2145.41,-1475.59 C4.1 ; C1.1 2314.34,-1565.66 2350,-1530 v2(2385,-1530) ; v2(2430.94,-224.27) S2.1 ; v2(2680.94,-224.27) S1.1 ; J2.13 v2(2892.73,-1541.75) ; v2(2930.94,-224.27) S3.1 ; J2.0@3005.55,-1762.22 v2(3005.55,-1696.22) ; v2(3005.55,-796.72) J2.0@3005.55,-730.72
  other v1: 600,-1191 960,-1191 930,-1131 990,-1131 60,-1071 120,-1071 180,-1071 240,-1071 300,-1071 360,-1071 480,-1071 540,-1071 660,-1071 720,-1071 900,-1071 960,-1071 1380,-1071 1440,-1071 90,-1011 510,-1011 570,-1011 630,-1011 690,-1011 1050,-1011 1110,-1011 1170,-1011 1230,-1011 1410,-1011 1470,-1011 1590,-1011 1650,-1011 1710,-1011 1890,-1011 2070,-1011 2130,-1011 60,-951 120,-951 480,-951 540,-951 600,-951 660,-951 720,-951 1080,-951 1140,-951 1200,-951 90,-891 150,-891 2430,-891 60,-831 120,-831 180,-831 240,-831 420,-831 480,-831 540,-831 600,-831 660,-831 720,-831 90,-771 150,-771 210,-771 390,-771 510,-771 570,-771 630,-771 690,-771 1050,-771 1110,-771 1170,-771 1230,-771 1470,-771 1650,-771 1710,-771 2370,-771 2430,-771 2490,-771 2550,-771 2610,-771 2670,-771 60,-711 120,-711 180,-711 240,-711 2400,-711 2520,-711 2580,-711 2640,-711 2700,-711 90,-651 150,-651 210,-651 270,-651 390,-651 510,-651 570,-651 630,-651 690,-651 1050,-651 1110,-651 1170,-651 1230,-651 1350,-651 1470,-651 1650,-651 1710,-651 2310,-651 2370,-651 2430,-651 2490,-651 2550,-651 2610,-651 2670,-651 60,-591 120,-591 180,-591 240,-591 300,-591 2220,-591 2520,-591 2580,-591 2700,-591 90,-531 150,-531 210,-531 270,-531 330,-531 390,-531 510,-531 570,-531 630,-531 690,-531 750,-531 990,-531 1050,-531 1110,-531 1170,-531 1230,-531 1290,-531 1650,-531 1710,-531 1830,-531 2070,-531 2130,-531 2190,-531 60,-471 120,-471 180,-471 240,-471 300,-471 360,-471 420,-471 480,-471 540,-471 600,-471 660,-471 720,-471 780,-471 1080,-471 1140,-471 1200,-471 1500,-471 1620,-471 1680,-471 1800,-471 1980,-471 2100,-471 2160,-471 90,-411 150,-411 210,-411 270,-411 330,-411 390,-411 510,-411 570,-411 630,-411 690,-411 750,-411 810,-411 870,-411 930,-411 990,-411 1050,-411 1110,-411 1170,-411 1230,-411 1290,-411 1470,-411 1530,-411 1650,-411 1710,-411 2070,-411 2130,-411 2190,-411 60,-351 120,-351 180,-351 240,-351 300,-351 360,-351 420,-351 480,-351 540,-351 600,-351 660,-351 720,-351 780,-351 840,-351 900,-351 960,-351 1020,-351 1080,-351 1140,-351 1200,-351 1260,-351 1320,-351 1500,-351 1560,-351 1620,-351 1680,-351 1740,-351 1800,-351 2100,-351 2160,-351 2280,-351 90,-291 150,-291 210,-291 270,-291 330,-291 390,-291 510,-291 570,-291 630,-291 690,-291 750,-291 810,-291 870,-291 930,-291 990,-291 1050,-291 1110,-291 1170,-291 1230,-291 1290,-291 1350,-291 1410,-291 1470,-291 1530,-291 1590,-291 1650,-291 1710,-291 1770,-291 1830,-291 1890,-291 1950,-291 2010,-291 2070,-291 2130,-291 2190,-291 60,-231 120,-231 180,-231 240,-231 300,-231 360,-231 420,-231 480,-231 540,-231 600,-231 660,-231 720,-231 780,-231 840,-231 900,-231 960,-231 1020,-231 1080,-231 1140,-231 1200,-231 1260,-231 1320,-231 1380,-231 1440,-231 1500,-231 1560,-231 1620,-231 1680,-231 1740,-231 1800,-231 1860,-231 1920,-231 1980,-231 2040,-231 2100,-231 2160,-231 2220,-231 90,-171 150,-171 210,-171 270,-171 330,-171 390,-171 510,-171 570,-171 630,-171 690,-171 750,-171 810,-171 870,-171 930,-171 990,-171 1050,-171 1110,-171 1170,-171 1230,-171 1290,-171 1350,-171 1410,-171 1470,-171 1530,-171 1590,-171 1650,-171 1710,-171 1770,-171 1830,-171 1890,-171 1950,-171 2010,-171 2070,-171 2130,-171 2190,-171 2250,-171 60,-111 120,-111 180,-111 240,-111 300,-111 360,-111 420,-111 480,-111 540,-111 600,-111 660,-111 720,-111 780,-111 840,-111 900,-111 960,-111 1020,-111 1080,-111 1140,-111 1200,-111 1260,-111 1320,-111 1380,-111 1440,-111 1500,-111 1560,-111 1620,-111 1680,-111 1740,-111 1800,-111 1860,-111 1920,-111 1980,-111 2040,-111 2100,-111 2160,-111 2220,-111 90,-51 150,-51 210,-51 270,-51 330,-51 390,-51 1350,-51 1410,-51 1470,-51 1530,-51 1590,-51 1650,-51 1710,-51 1770,-51 1830,-51 1890,-51 1950,-51 2010,-51 2070,-51 2130,-51 2190,-51 2250,-51 2310,-51
LF_MISO_SRC: C6_14G.2 J2.9 R4_14G.1 TP9.1 | length 1920.6
  Signal Layer 1 w7: v1(2015,-1300) 2499.96,-1299.96 2505.53,-1305.53 TP9.1 J2.9
  Signal Layer 2 w7: R4_14G.1 C6_14G.2 2018.34,-352.44 2022.44,-356.54 2022.44,-1289.4 2015,-1296.84 v1(2015,-1300)
LF_MOSI_DST: C6_14H.2 J2.10 R4_14H.1 TP10.1 | length 1650.4
  Signal Layer 1 w7: v1(1980,-1320) 1981.5,-1321.5 2461.5,-1321.5 2505,-1365 TP10.1 J2.10@2808.7,-1365
  Signal Layer 2 w7: R4_14H.1 C6_14H.2 1916.03,-650 1974.4,-650 1978.5,-654.1 1978.5,-1318.5 v1(1980,-1320)
LF_MUX_SEL_0_DST: C6_14I.2 J2.1 R4_14I.1 TP1.1 | length 2063.3
  Signal Layer 1 w7: v1(960,-845) 960.41,-844.59 2445.41,-844.59 2457.55,-832.45 TP1.1 ; TP1.1@2630,-833.09 J2.1
  Signal Layer 2 w7: R4_14I.1 C6_14I.2 955.9,-940 960,-935.9 v1(960,-845)
LF_MUX_SEL_1_DST: C6_14J.2 J2.7 R4_14J.1 TP7.1 | length 2435.2
  Signal Layer 1 w7: v1(1005,-1070) 1266.96,-1070 1383.74,-1186.78 TP7.1 ; TP7.1@2630,-1187.42 J2.7
  Signal Layer 2 w7: R4_14J.1 C6_14J.2 991.9,-641 1005,-654.1 v1(1005,-1070)
LF_RST_DST: C6_14K.2 J2.12 R4_14K.1 TP12.1 | length 2874.7
  Signal Layer 1 w7: v1(1105,-1365) 2442.31,-1365 TP12.1 J2.12
  Signal Layer 2 w7: R4_14K.1 C6_14K.2 1016.9,-491 1026.5,-500.6 1026.5,-1351.5 1040,-1365 v1(1105,-1365)
LF_RX_PWR: C6_14N.2 J3.2 R4_14N.1 | length 2070.4
  Signal Layer 1 w7: v1(230,-910) v1(2050,-910)
  Signal Layer 2 w7: v1(230,-910) 230,-988.79 J3.2 ; v1(2050,-910) 2050,-872.42 2054.42,-868 C6_14N.2 2178,-868 R4_14N.1
LF_SCK_DST: C6_14L.2 J2.8 R4_14L.1 TP8.1 | length 1704.5
  Signal Layer 1 w7: v1(2000,-1240) 2002.41,-1237.59 2341.51,-1237.59 2350.39,-1246.47 TP8.1 J2.8
  Signal Layer 2 w7: R4_14L.1 C6_14L.2 1995.9,-500.29 2000,-504.39 v1(2000,-1240)
LF_TX_PWR: C6_14O.2 J3.3 R4_14O.1 | length 2158.2
  Signal Layer 1 w7: v1(290,-721.5) v1(2053.5,-721.5)
  Signal Layer 2 w7: J3.3 v1(290,-721.5) ; v1(2053.5,-721.5) C6_14O.2 R4_14O.1
NetR1_2: R1.2 R5.2 S1.3 | length 212.4
  Signal Layer 1 w7: R5.2 2749.53,-59.53 2765,-75 2797.56,-75 2799.06,-76.5 S1.3
NetR2_2: R2.2 R6.2 S2.3 | length 212.5
  Signal Layer 1 w7: R6.2 2499.53,-25.47 2518.58,-44.53 R2.2 2549.53,-157.8 S2.3@2548.58,-158.74
NetR3_2: R3.2 R16.2 S3.3 | length 175.4
  Signal Layer 1 w7: R16.2 2996.5,-76.5 3016.5,-96.5 R3.2 3049.06,-97.44 S3.3
NetR4_2: R4.2 R7.1 U1.8 | length 170.7
  Signal Layer 2 w7: R7.1 R4.2 U1.8
NetR8_2: R8.2 R9.1 U2.8 | length 203.5
  Signal Layer 2 w7: U2.8 2713.23,-1019.1 2717.33,-1015 2742.97,-1015 R9.1 2743.29,-977.56 R8.2
NetR10_2: R10.2 R11.1 U3.8 | length 138.2
  Signal Layer 2 w7: R11.1 R10.2 U3.8
NetR12_2: R12.2 R13.1 U4.8 | length 113.2
  Signal Layer 2 w7: R13.1 R12.2 U4.8
NetR14_2: R14.2 R15.1 U5.8 | length 138.2
  Signal Layer 2 w7: R15.1 R14.2 U5.8
SRC_CS_CTRL_0: J5.24 U3.10 | length 713.9
  Signal Layer 1 w7: J5.24 1122.83,-1637.83 1110,-1625 1089.1,-1625 1075,-1610.9 1075,-1260 1100.05,-1234.95 v1(1235,-1234.95)
  Signal Layer 2 w7: v1(1235,-1234.95) 1260,-1209.95 1260,-1152.55 U3.10
SRC_CS_CTRL_1: J5.26 U3.2 | length 558.2
  Signal Layer 2 w7: J5.26 1022.83,-1637.17 1040,-1620 1070,-1620 1075,-1615 1075,-1505 1125,-1455 1330.9,-1455 1337.43,-1448.47 U3.2
SRC_CS_CTRL_2: J5.29 U3.3 | length 612.1
  Signal Layer 2 w7: J5.29 825,-1575.61 824.7,-1575.3 824.7,-1540.3 867.35,-1497.65 1057.35,-1497.65 1115,-1440 1300,-1440 1311.84,-1428.16 U3.3
SRC_CS_CTRL_3: J5.31 U3.4 | length 689.4
  Signal Layer 2 w7: J5.31 722.83,-1527.17 740,-1510 830,-1510 865.31,-1474.69 1055.31,-1474.69 1105,-1425 1279.72,-1425 1286.25,-1418.47 U3.4
SRC_CS_CTRL_4: J5.33 U4.3 | length 358.2
  Signal Layer 2 w7: J5.33 622.83,-1497.17 640,-1480 795,-1480 810.59,-1464.41 U4.3
SRC_D/C: J5.40 U5.2 | length 2378
  Signal Layer 1 w7: J5.40 320,-1680.61 320,-1740.9 324.1,-1745 1160,-1745 1175,-1730 1175,-1525 1195,-1505 1959.19,-1505 2034.19,-1430 v1@2340,-1430
  Signal Layer 2 w7: v1(2339.25,-1429.25) 2339.59,-1428.91 2339.59,-1388.45 U5.2
SRC_DRV_EN: J5.15 U1.2 | length 488
  Signal Layer 2 w7: J5.15 1523.8,-1576.81 1523.8,-1540.3 1534.1,-1530 1820,-1530 1838.68,-1511.32 1838.68,-1435.66 U1.2
SRC_DS_MISO: J5.22 U2.5 | length 1930.9
  Signal Layer 1 w7: J5.22 1223.5,-1678.44 1223.5,-1721.53 1248.21,-1746.24 2633.76,-1746.24 2665,-1715 2703.5,-1715 v1(2705,-1716.5)
  Signal Layer 2 w7: v1(2705,-1716.5) 2706.5,-1715 2755.31,-1715 2764.41,-1705.9 U2.5
SRC_DS_MOSI: J5.37 U2.2 | length 3072.2
  Signal Layer 2 w7: J5.37 388.47,-1577.77 384.37,-1581.87 384.37,-1770.9 388.47,-1775 2837.08,-1775 2841.18,-1770.9 U2.2
SRC_DS_RESET: J5.18
SRC_DS_SCK: J5.13 U2.4 | length 1720.7
  Signal Layer 2 w7: J5.13 1584.37,-1577.77 1584.37,-1693.71 1628.66,-1738 2777,-1738 2790,-1725 U2.4
SRC_HRBT: J5.07 U5.3 | length 533.4
  Signal Layer 2 w7: J5.07 1922.83,-1532.17 1930,-1525 1995,-1525 2012.63,-1507.37 2097.63,-1507.37 2140,-1465 2300,-1465 2314.34,-1450.66 U5.3
SRC_MD_MISO: J5.21 U1.5 | length 709.3
  Signal Layer 2 w7: J5.21 1222.83,-1501.27 1234.1,-1490 1740,-1490 1761.91,-1468.09 U1.5
SRC_MD_MOSI: J5.19 U1.3 | length 668.2
  Signal Layer 2 w7: J5.19 1322.83,-1530.98 1338.82,-1515 1808.99,-1515 1813.09,-1510.9 1813.09,-1435.66 U1.3
SRC_MD_RESET: J5.32 U4.10 | length 601.7
  Signal Layer 1 w7: v1(715,-1315) 675,-1355 675,-1665 685,-1675 720.06,-1675 J5.32
  Signal Layer 2 w7: v1(715,-1315) 715,-1235 760,-1190 760,-1152.48 U4.10
SRC_MD_SCK: J5.23 U1.4 | length 847.7
  Signal Layer 1 w7: J5.23 1122.83,-1477.17 1134.1,-1465.9 v1(1787.5,-1465.9)
  Signal Layer 2 w7: v1(1787.5,-1465.9) U1.4
SRC_MUX_SEL_0: J5.36 U4.2 | length 557.1
  Signal Layer 2 w7: J5.36 522.83,-1637.17 540,-1620 645,-1620 665,-1600 665,-1510 680,-1495 810,-1495 836.18,-1468.82 U4.2
SRC_MUX_SEL_1: J5.35 U4.4 | length 430.1
  Signal Layer 2 w7: J5.35 525,-1575.61 525,-1490 550,-1465 775,-1465 785,-1455 U4.4
SRC_RX: J5.10 U5.5 | length 670.9
  Signal Layer 2 w7: J5.10 1857.23,-1677.77 1864.86,-1670.14 1864.86,-1515.14 1887.5,-1492.5 1947.5,-1492.5 2010,-1430 2255,-1430 2263.16,-1421.84 U5.5
SRC_TFT_CS: J5.16 U2.3 | length 1732.1
  Signal Layer 2 w7: J5.16 1522.83,-1750.9 1526.93,-1755 2811.49,-1755 2815.59,-1750.9 U2.3
SRC_TX: J5.08 U5.4 | length 680.6
  Signal Layer 2 w7: J5.08 1887.77,-1677.77 1880,-1670 1880,-1532.04 1902.04,-1510 1960,-1510 2025,-1445 2280,-1445 2288.75,-1436.25 U5.4
SW_A: C2.2 J5.12 R5.1 | length 3201.6
  Signal Layer 1 w7: J5.12 1722.83,-1715.9 1723.18,-1716.24 2612.14,-1716.24 2648.38,-1680 2731.62,-1680 2742.52,-1690.9 2921.38,-1690.9 2965,-1647.28 2965,-890 2625,-550 2625,-100 2686.54,-38.46 R5.1 C2.2
SW_B: C3.2 J5.38 R6.1 | length 3749.3
  Signal Layer 1 w7: v1(450,-45) 1320,-45 1379.53,14.53 R6.1 C3.2
  Signal Layer 2 w7: J5.38 463.67,-1677.77 467.77,-1673.67 467.77,-1627.07 467.77,-1282.77 450,-1265 v1(450,-45)
SW_C: C10.2 J5.11 R16.1 | length 3290
  Signal Layer 1 w7: J5.11 1720.97,-1579.63 1685.37,-1579.63 1684.37,-1580.63 1684.37,-1698.64 1716.96,-1731.24 2618.35,-1731.24 2654.59,-1695 2725.41,-1695 2736.31,-1705.9 2945.31,-1705.9 2990,-1661.21 2990,-880 2880,-770 2880,-115 2933.5,-61.5 R16.1 2933.5,42.01 C10.2
pads on no net: J5.03 J5.05 J5.27 J5.28 S1.2 S1.4 S2.2 S2.4 S3.2 S3.4 U1.6 U1.9 U2.6 U2.9 U3.6 U3.9 U4.6 U4.9 U5.6 U5.9

## Polygon pours and split planes (outlines as drawn)
JETSON_GND on Power Plane "JETSON_GND_L02_P189" (solid, pour order 189): 0,-1811 0,0 1305,0 1305,318.14 2440,320 3110.07,45.18 3110,45 3110,-1809 3110,-1811
JETSON_3V3 on Power Plane "Power Plane-JETSON_3V3" (solid, remove dead copper, pour order 187): 0,-1810 3110,-1810 3110,130 2350,130 2350,-935 2450,-935 2450,-335 2720,-335 2720,-935 2840,-935 2875,-970 2875,-1425 2475,-1425 2290,-1240 565,-1240 525,-1200 525,-1100 0,-1100
JETSON_GND on Signal Layer 2 "JETSON_GND_L04_P013" (solid, pour order 13): 0,-1811 0,0 1305,0 1305,318.14 2440,320 3110.07,45.18 3110,45 3110,-1809 3110,-1811
JETSON_GND on GND Plane "JETSON_GND_L03_P015" (solid, pour order 15): 0,-1811 0,0 1305,0 1305,318.14 2440,320 3110.07,45.18 3110,45 3110,-1809 3110,-1811
JETSON_GND on Signal Layer 1 "JETSON_GND_L01_P186" (solid, pour order 186): 0,-1811 0,0 1305,0 1305,318.14 2440,320 3110.07,45.18 3110,45 3110,-1809 3110,-1811

## Keep-outs
Keep-Out Layer:
  lines w50: 3110,-1812.54 0,-1812.54 0,-1.54 1305,-1.54 1305,316.6 2440,318.46 3110.07,43.64 ; 3110,-1810.54 3110,43.46

## Silkscreen, mask and mechanical layers (free items; w line width, h text height)
Top Overlay:
  drawing of 16 lines, arcs and shapes, not listed
  text "UI-V1.1 / UBC Thunderbots /  / Designer: / Kenny Wakaba /  / 10/11/2022" at 330,-590 h30
  text "MUX0" at 2383.32,-854 h30
  text "CS0" at 2413.31,-915 h30
  text "CS1" at 2423.31,-976 h30
  text "CS2" at 2413.31,-1037 h30
  text "CS3" at 2413.31,-1098 h30
  text "CS4" at 2413.31,-1159 h30
  text "MUX1" at 2393.32,-1220 h30
  text "SCK" at 2413.31,-1281 h30
  text "MISO" at 2388.32,-1342 h30
  text "MOSI" at 2393.32,-1403 h30
  text "EN" at 2441.95,-1464 h30
  text "RST" at 2413.31,-1525 h30
  text "EN" at 1535,-1531 h20 r90
  text "GND" at 340,-1534.22 h20 r90
  text "MUX1" at 537.24,-1534.22 h20 r90
  text "CS4" at 635.67,-1534.23 h20 r90
  text "CS3" at 738.03,-1534.23 h20 r90
  text "CS2" at 844.32,-1534.22 h20 r90
  text "GND" at 1041.18,-1534.23 h20 r90
  text "SCK" at 1141.18,-1534.23 h20 r90
  text "MISO" at 1241.18,-1534.23 h20 r90
  text "MOSI" at 1341.18,-1534.22 h20 r90
  text "3V3" at 1441.17,-1534.22 h20 r90
  text "GND" at 1840.39,-1534.22 h20 r90
  text "HB" at 1934.88,-1534.22 h20 r90
  text "3V3" at 2249.8,-1550.8 h30
  text "GND" at 2625,-1581 h30
  text "3V3" at 2625,-1641 h30
  text "RX" at 1840,-1755.01 h20 r90
  text "TX" at 1940,-1755.01 h20 r90
  text "5V" at 2144.99,-1755.01 h20 r90
  text "5V" at 2245,-1755.01 h20 r90
  text "CS1" at 1040,-1768.34 h20 r90
  text "SDO" at 340,-1775.01 h20 r90
  text "GND" at 640,-1775.01 h20 r90
  text "RST" at 740,-1775.01 h20 r90
  text "GND" at 840,-1775.01 h20 r90
  text "CS0" at 1140,-1775.01 h20 r90
  text "GND" at 1340,-1775.01 h20 r90
  text "GND" at 1640,-1775.01 h20 r90
  text "GND" at 2039.99,-1775.01 h20 r90
  text "MUX0" at 540,-1795 h20 r90
Bottom Overlay:
  text "GND" at 195,-621 h30 r90
  text "3V3" at 430,-621 h30 r90
  text "TX" at 250,-651 h30 r90
  text "RX" at 315,-651 h30 r90
  text "HB" at 375,-651 h30 r90
Mechanical 1:
  lines w7: 3110,-1812 0,-1812 0,-1 1305,-1 1305,317.14 2440,319 3110.07,44.18 ; 3110,-1810 3110,44
Drill Drawing:
  lines w7: 3110,-1812 0,-1812 0,-1 1305,-1 1305,317.14 2440,319 3110.07,44.18 ; 3110,-1810 3110,44